# EAGLE board motor_updated_v2.0 (EAGLE 7.5.0)
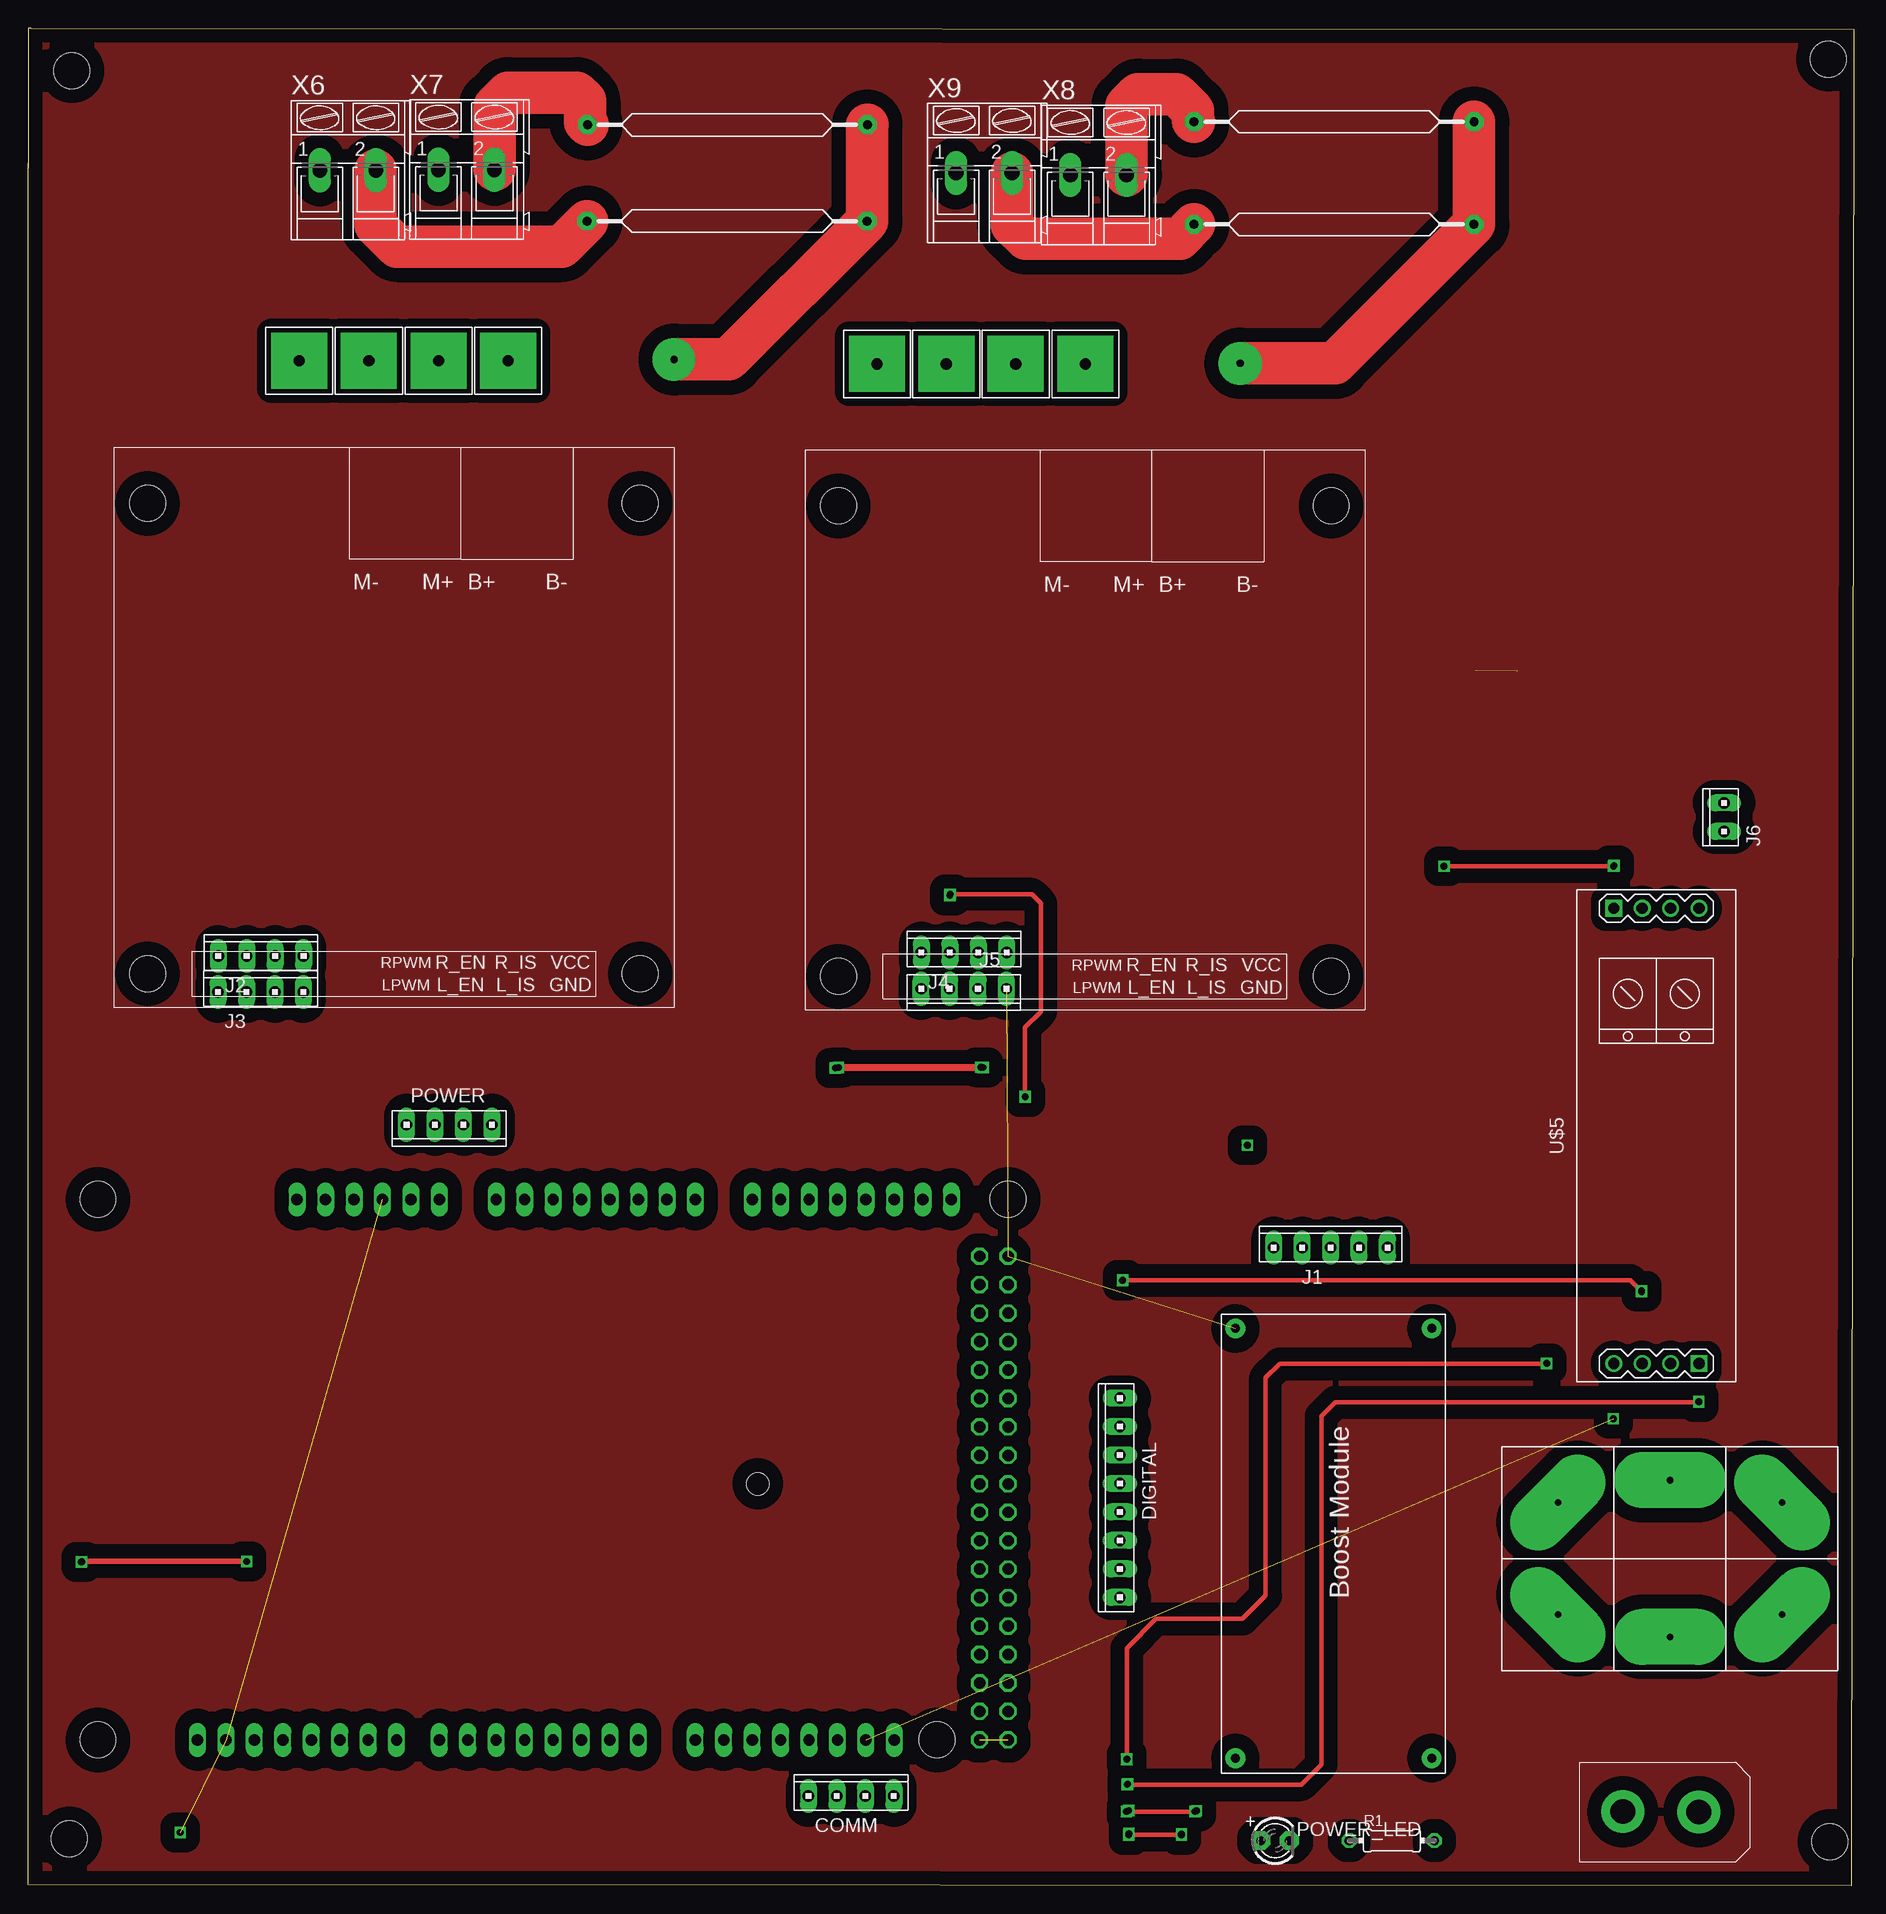
[diagram p0: board, top side]
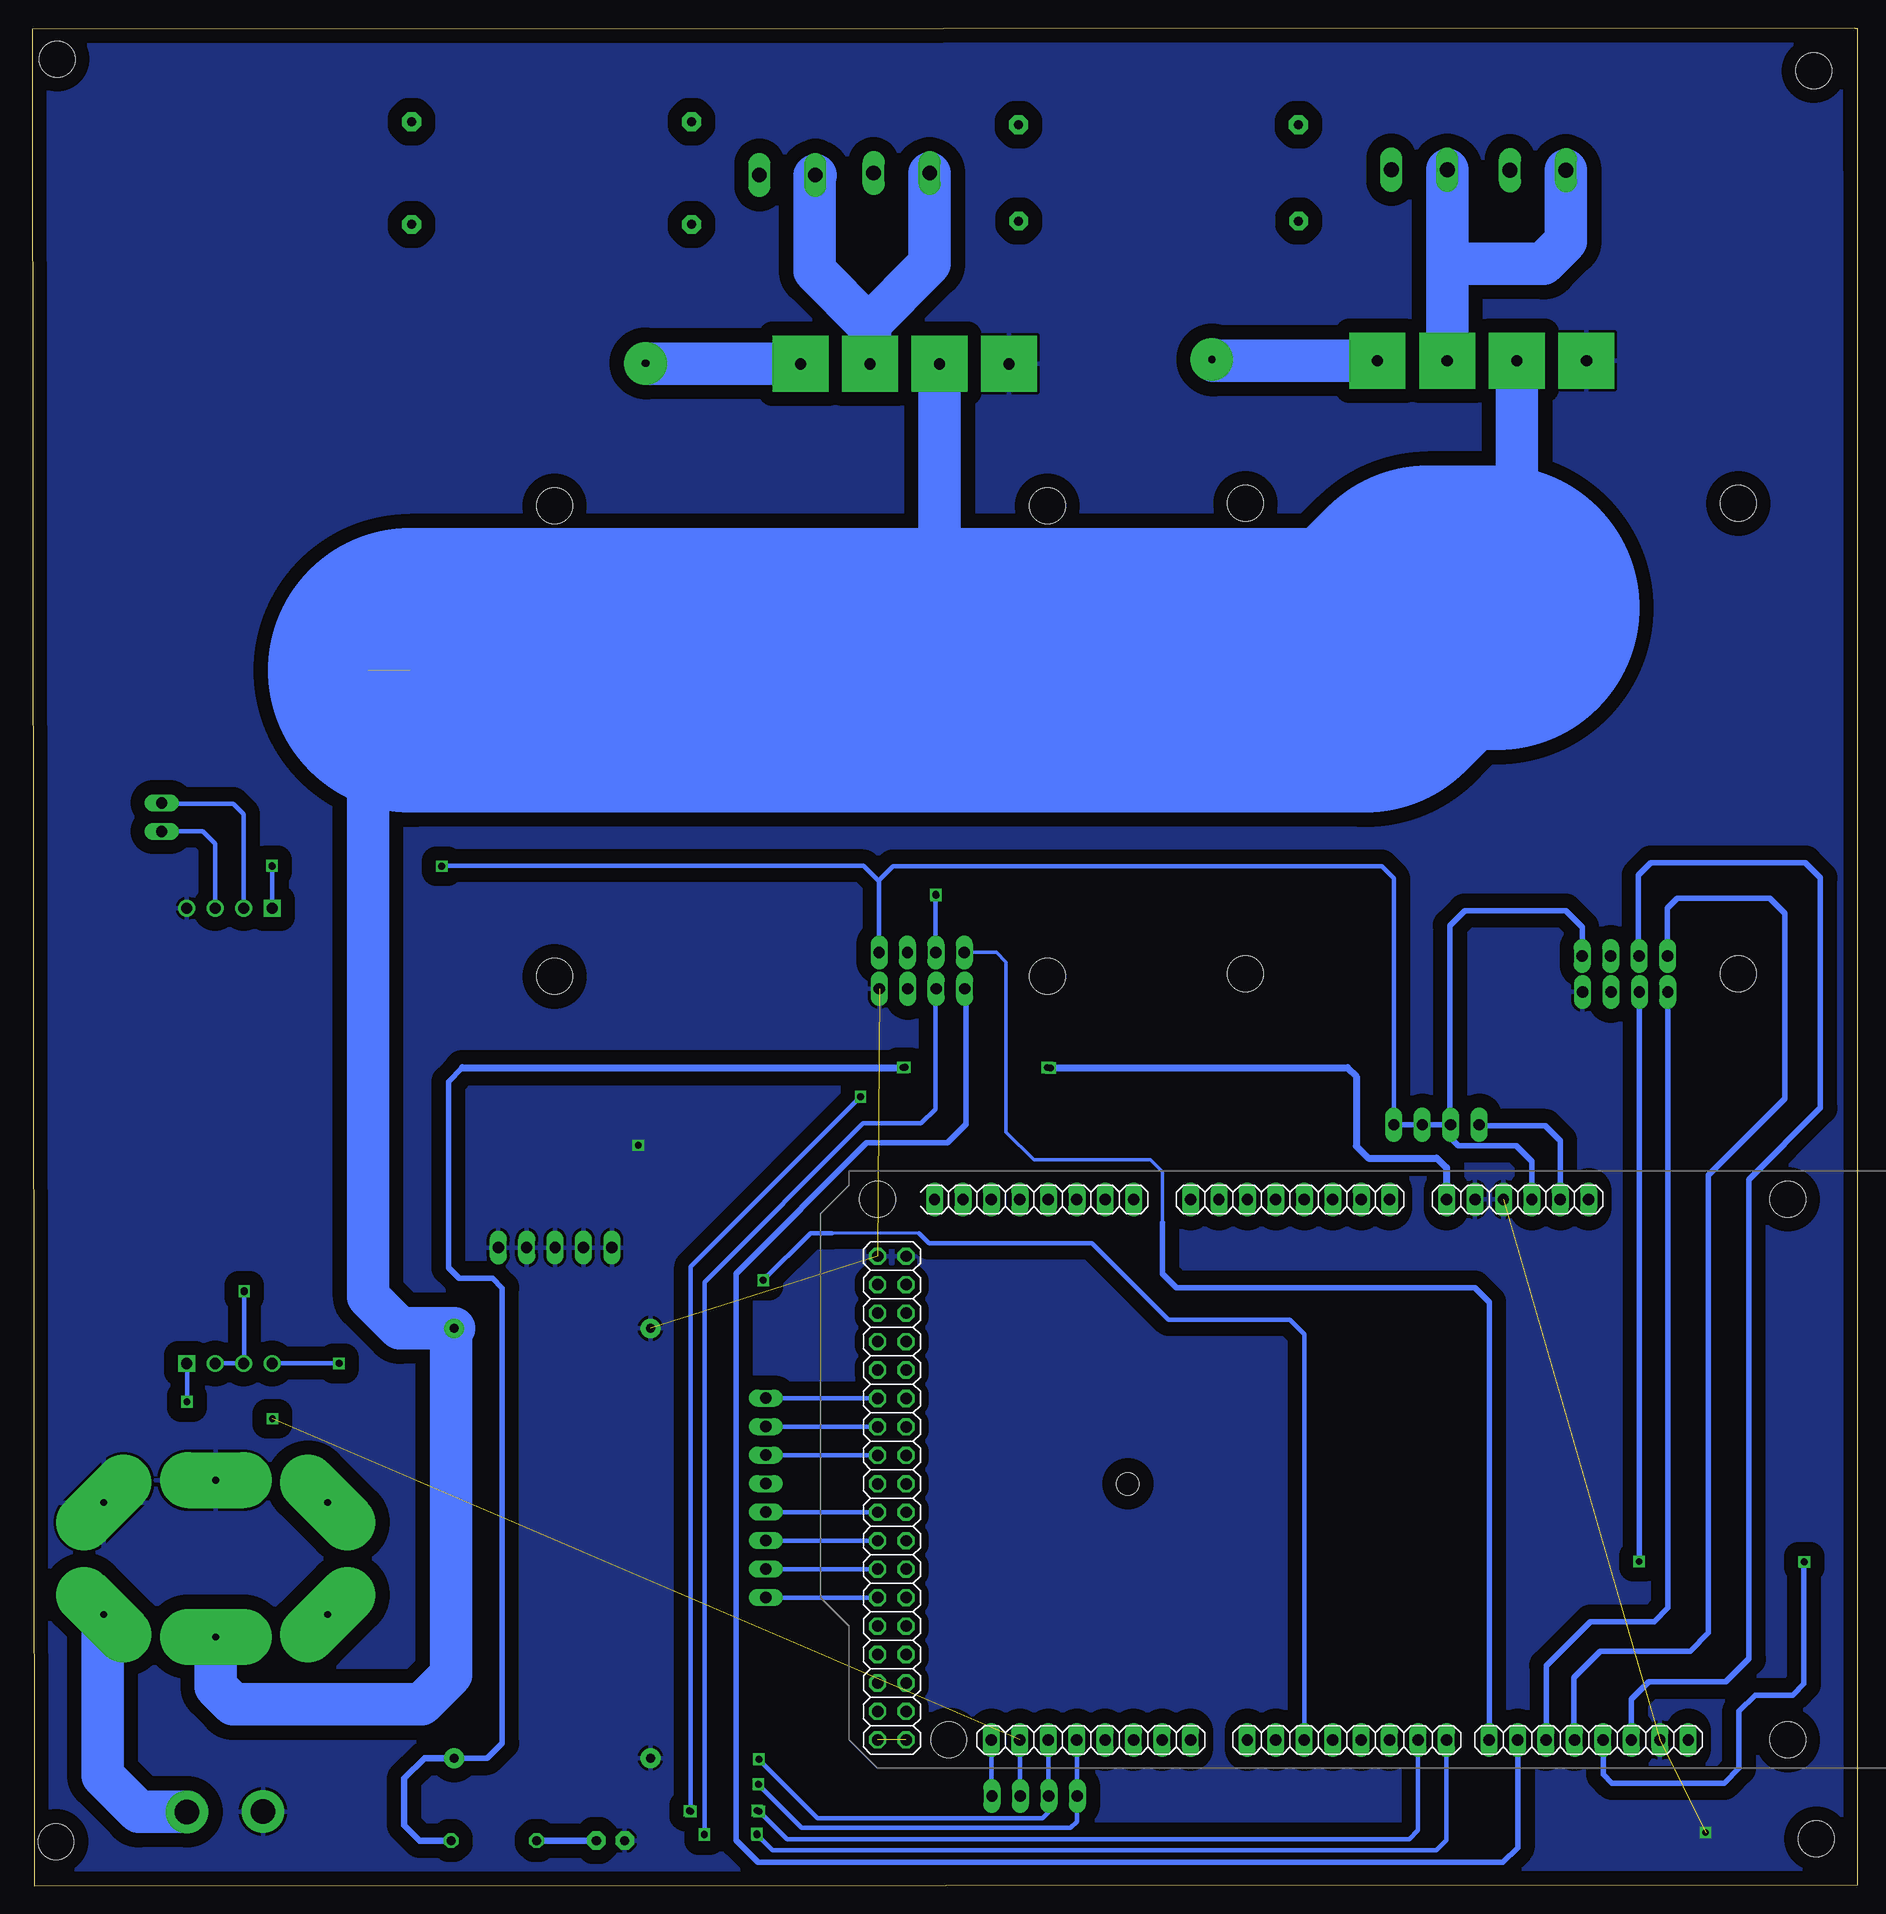
[diagram p1: board, bottom side, seen from below]

Size 163.04 x 165.86 mm. Coordinates in mm from the lower left corner, seen from the top.
Outline: 0.25,165.84 163.04,165.76 162.84,0 0,0.08 0,153.77
Outline: 0.28,165.86 0.02,165.86 0.02,153.34
Copper layers (1*16): Top 0.035mm / dielectric 1.5mm / Bottom 0.035mm
Design rules "default": minimum track width 10mil, minimum drill 24mil, track to track 8mil, track to pad 8mil, pad to pad 8mil, via to via 8mil, smd to smd 8mil, copper to edge 40mil, drill to drill 8mil, minimum pad ring 10mil, minimum via ring 8mil, stop-mask expansion 4mil, vias tented up to drill 0mil, thermal gap 10mil
Holes 3.2 mm at 3.7,4.2 160.79,163.08 3.92,162.04 160.9,3.95

## Footprints (pad centres in the part's own frame; a part is rotated, then mirrored left to right if it is on the bottom)
10X04MTA = drill 1.016 long: 1 3.81,0; 2 1.27,0; 3 -1.27,0; 4 -3.81,0
10X08MTA = drill 1.016 long: 1 8.89,0; 2 6.35,0; 3 3.81,0; 4 1.27,0; 5 -1.27,0; 6 -3.81,0; 7 -6.35,0; 8 -8.89,0
MEGA_ARDUINO = drill 1.016 long: 1 33.02,2.54; 2 35.56,2.54; 3 38.1,2.54; 4 40.64,2.54; 5 43.18,2.54; 6 45.72,2.54; 7 50.8,2.54; 8 53.34,2.54; 9 55.88,2.54; 10 58.42,2.54; 11 60.96,2.54; 12 63.5,2.54; 13 66.04,2.54; 14 68.58,2.54; 15 73.66,2.54; 16 76.2,2.54; 17 78.74,2.54; 18 81.28,2.54; 19 83.82,2.54; 20 86.36,2.54; 21 88.9,2.54; 22 91.44,2.54; 23 86.36,50.8; 24 83.82,50.8; 25 81.28,50.8; 26 78.74,50.8; 27 76.2,50.8; 28 73.66,50.8; 29 71.12,50.8; 30 68.58,50.8; 31 63.5,50.8; 32 60.96,50.8; 33 58.42,50.8; 34 55.88,50.8; 35 53.34,50.8; 36 50.8,50.8; 37 48.26,50.8; 38 45.72,50.8; 39 41.91,50.8; 40 39.37,50.8; 41 36.83,50.8; 42 34.29,50.8; 43 31.75,50.8; 44 29.21,50.8; 45 26.67,50.8; 46 24.13,50.8 | drill 1.016 octagon: 47 93.98,50.8; 48 96.52,50.8; 49 93.98,48.26; 50 96.52,48.26; 51 93.98,45.72; 52 96.52,45.72; 53 93.98,43.18; 54 96.52,43.18; 55 93.98,40.64; 56 96.52,40.64; 57 93.98,38.1; 58 96.52,38.1; 59 93.98,35.56; 60 96.52,35.56; 61 93.98,33.02; 62 96.52,33.02; 63 93.98,30.48; 64 96.52,30.48; 65 93.98,27.94; 66 96.52,27.94; 67 93.98,25.4; 68 96.52,25.4; 69 93.98,22.86; 70 96.52,22.86; 71 93.98,20.32; 72 96.52,20.32; 73 93.98,17.78; 74 96.52,17.78; 75 93.98,15.24; 76 96.52,15.24; 77 93.98,12.7; 78 96.52,12.7; 79 93.98,10.16; 80 96.52,10.16; 81 93.98,7.62; 82 96.52,7.62 | hole 3.2: 15.24,50.8; 15.24,2.54; 90.17,50.8; 96.52,2.54 | hole 2: 74.168,27.94
10X05MTA = drill 1.016 long: 1 5.08,0; 2 2.54,0; 3 0,0; 4 -2.54,0; 5 -5.08,0
10X02MTA = drill 1.016 long: 1 1.27,0; 2 -1.27,0
LED3MM = drill 0.813 pad 1.676 octagon: A -1.27,0; K 1.27,0
0204/7 = drill 0.813 octagon: 1 -3.81,0; 2 3.81,0
BOOST_MODULE = drill 0.8 pad 1.778: IN+ 1.27,18.796; IN- 1.27,1.27; OUT+ 39.624,18.796; OUT- 39.624,1.27
CONNECTOR = drill 2.2 pad 3.81: P$1 4.42,11.938; P$2 4.394,5.156
IBT-2 = hole 3.2: 34,14; -10,14; -10,-28; 34,-28
RS485-TTL-CONVERTER = drill 1 square: J1.1 -20.32,-3.81; J2.1 20.32,3.81 | drill 1: J1.2 -20.32,-1.27; J1.3 -20.32,1.27; J1.4 -20.32,3.81; J2.2 20.32,1.27; J2.3 20.32,-1.27; J2.4 20.32,-3.81
VIA = drill 1 pad 5 square: P$1 -4,3
FUSE_MINE = drill 0.8 pad 1.676 octagon: P$1 -11,4; P$2 14,4
TOGGLE = drill 0.6 pad 5 long: P$1 0,-2; P$2 0,-16; P$3 -10,-4; P$4 10,-14; P$5 -10,-14; P$6 10,-4
AK300/2 = drill 1.321 long: 1 -2.515,0; 2 2.489,0

## Placement (x,y rotation side)
COMM  [10X04MTA]  73.51,8.03 0 top
DIGITAL  [10X08MTA]  97.51,34.65 90 top
IC1  [MEGA_ARDUINO]  -8.99,63.83 180 bottom
J1  GND\  [10X05MTA]  116.33,56.97 0 top
J2  [10X04MTA]  20.8,83.01 0 top
J3  [10X04MTA]  20.78,79.81 0 top
J4  [10X04MTA]  83.59,83.31 0 top
J5  [10X04MTA]  83.57,80.09 180 top
J6  [10X02MTA]  151.46,95.4 90 top
POWER  [10X04MTA]  37.62,67.95 180 top
POWER_LED  [LED3MM]  111.38,4.04 0 top
R1  [0204/7]  121.79,4.04 0 top
U$1  BOOST_MODULE  [BOOST_MODULE]  106.55,51.03 270 top
U$2  XT60  [CONNECTOR]  137.26,11.02 270 top
U$3  [IBT-2]  20.68,109.42 0 top
U$4  [IBT-2]  82.37,109.19 0 top
U$5  RS485-TTL-CONVERTER  [RS485-TTL-CONVERTER]  145.41,66.95 90 top
U$6  VIA  [VIA]  28.22,133.15 0 top
U$8  VIA  [VIA]  86,132.87 0 top
U$9  VIA  [VIA]  79.81,132.87 0 top
U$12  VIA  [VIA]  40.67,133.15 0 top
U$13  VIA  [VIA]  46.89,133.15 0 top
U$14  VIA  [VIA]  92.2,132.87 0 top
U$15  VIA  [VIA]  98.43,132.87 0 top
U$18  FUSE_MINE  [FUSE_MINE]  60.93,144.63 0 top
U$19  FUSE_MINE  [FUSE_MINE]  63.96,161.21 180 top
U$20  FUSE_MINE  [FUSE_MINE]  115.14,153.49 0 top
U$21  FUSE_MINE  [FUSE_MINE]  118.14,152.32 180 top
U$23  VIA  [VIA]  34.44,133.15 0 top
U$24  SWITCH  [TOGGLE]  146.63,20.22 180 top
X6  [AK300/2]  28.58,153.16 0 top
X7  [AK300/2]  39.17,153.21 0 top
X8  [AK300/2]  95.61,152.73 0 top
X9  [AK300/2]  85.39,152.91 0 top

## Library data of the parts
COMM DIGITAL J1-J6 POWER = con-amp
IC1 = arduino
POWER_LED = adafruit
R1 = rcl
U$1 = Boost Module
U$2 = xt60_V2
U$3 U$4 = bts
U$5 = diy-modules
U$6 U$8 U$9 U$12-U$15 U$23 = via
U$18-U$21 = fuse_mine
U$24 = toggle
X6-X9 = con-ptr500; OC_FARNELL: unknown; OC_NEWARK: unknown

## Nets
+5V: IC1.47 IC1.48
GND: IC1.4 IC1.5 IC1.45 IC1.81 IC1.82 J1.1 J1.2 J1.3 J1.4 J1.5 J3.1 J5.4 POWER_LED.A U$1.IN- U$1.OUT- U$2.P$2 U$5.J2.4 U$6.P$1 U$9.P$1 U$24.P$2 U$24.P$5
N$1: IC1.6 R1.2 U$1.OUT+
N$2: COMM.1 IC1.23
N$3: U$2.P$1 U$24.P$3
N$4: COMM.2 IC1.24
N$5: COMM.3 IC1.25 U$5.J1.4
N$6: COMM.4 IC1.26 U$5.J1.1
N$7: IC1.2 POWER.1
N$8: DIGITAL.8 IC1.58
N$9: IC1.39 J4.4
N$11: IC1.33 U$5.J1.2 U$5.J1.3
N$12: U$1.IN+ U$8.P$1 U$23.P$1 U$24.P$1
N$14: J6.2 U$5.J2.3
N$15: POWER_LED.K R1.1
N$16: J6.1 U$5.J2.2
N$18: DIGITAL.7 IC1.60
N$19: DIGITAL.4
N$20: DIGITAL.5 IC1.64
N$21: DIGITAL.3 IC1.68
N$22: DIGITAL.2 IC1.70
N$23: DIGITAL.1 IC1.72
N$25: U$12.P$1 X6.1 X7.1
N$26: U$13.P$1 U$18.P$2 U$19.P$1
N$28: U$14.P$1 X8.1 X9.1
N$29: U$15.P$1 U$20.P$2 U$21.P$1
N$32: IC1.44 J2.3
N$34: DIGITAL.6 IC1.62
N$35: IC1.43 J3.3
N$37: IC1.37 J4.3
N$38: IC1.38 J5.2
N$39: IC1.42 J2.4
N$40: IC1.41 J3.4
N$41: U$19.P$2 X7.2
N$42: IC1.40 J5.1
N$45: U$18.P$1 X6.2
N$46: U$21.P$2 X9.2
N$47: U$20.P$1 X8.2
POWER: IC1.3 J2.1 J4.1 POWER.2 POWER.3 POWER.4 U$5.J2.1

## Tracks (layer width: path | path; a pad name or v marks a point on that pad's centre or on a via)
+5V  (1 unrouted)
GND  (via drill 0.6)  (4 unrouted)
  other vias: 108.89,66.12 13.59,4.75
  pour Bottom (isolate 1.27): -0.18,-0.23 0.18,165.74 163.3,165.66 162.94,-0.3
N$1  (via drill 0.6)
  Top 0.61: v85.29,73.05 v72.39,73.05
  Bottom 0.508: U$1.OUT+ 122.4,11.4 121.06,12.75 121.06,53.37 121.92,54.23 124.92,54.23 125.86,55.17 125.86,71.81 124.61,73.05
  Bottom 0.559: U$1.OUT+ 127.99,11.4 129.79,9.6 129.79,5.41 128.42,4.04 R1.2
  Bottom 0.61: 124.61,73.05 v85.29,73.05 | v72.39,73.05 45.57,73.05 44.78,72.26 44.78,66.04 43.71,64.97 37.59,64.97 36.73,64.11 IC1.6
N$2
  Bottom 0.406: IC1.23 77.37,8.08 COMM.1
N$3
  Bottom 3.81: U$2.P$1 153.52,6.6 156.74,9.83 156.74,24.11 U$24.P$3
N$4  (via drill 0.6)  (1 unrouted)
  Bottom 0.406: IC1.24 74.83,8.08 COMM.2
  other vias: 141.58,41.71
N$5  (via drill 0.6)
  Top 0.406: v98.12,11.28 98.12,21.21 100.74,23.83 108.46,23.83 110.52,25.88 110.52,45.34 111.79,46.61 135.56,46.61 v135.61,46.66
  Bottom 0.406: COMM.3 72.29,8.08 IC1.25 72.29,6.58 72.82,6.05 92.89,6.05 v98.12,11.28 | v135.61,46.66 141.58,46.66 U$5.J1.4
N$6  (via drill 0.6)
  Top 0.406: v98.17,9.04 113.72,9.04 115.49,10.82 115.49,41.91 116.76,43.18 149.17,43.18 v149.2,43.21
  Bottom 0.406: COMM.4 69.75,8.08 IC1.26 69.75,5.74 70.31,5.18 94.31,5.18 v98.17,9.04 | v149.2,43.21 149.2,46.61 U$5.J1.1
N$7
  Bottom 0.508: IC1.2 26.57,66.52 27.89,67.84 33.71,67.84 POWER.1
N$8
  Bottom 0.406: IC1.58 97.48,25.73 DIGITAL.8
N$9
  Bottom 0.305: 62.1,59.21 62.1,63.75 63.17,64.82 73.58,64.82 76.05,67.28 76.05,82.47 76.94,83.36 79.73,83.36 J4.4
  Bottom 0.508: IC1.39 32.92,52.12 34.21,53.42 60.86,53.42 62.08,54.64 62.08,59.18 62.1,59.21
N$10  (via drill 0.6)
  other vias: 98.32,4.67
N$11  (via drill 0.6)
  Top 0.406: v97.74,54.05 143.08,54.05 v144.09,53.04
  Bottom 0.254: 83.84,58.27 91.62,58.27
  Bottom 0.406: IC1.33 49.43,49.25 50.72,50.55 61.54,50.55 68.38,57.38 82.96,57.38 83.84,58.27 | 91.62,58.27 93.52,58.27 v97.74,54.05 | v144.09,53.04 144.09,46.69 U$5.J1.3 U$5.J1.2
N$12  (1 unrouted)
  Bottom 25.4: 32.21,114.1 38.38,114.1 43.97,108.51 129.29,108.51
  Bottom 3.81: U$8.P$1 82,114.43 | 82,114.43 82,114.14 81.86,114 | U$24.P$1 146.63,17.75 145.08,16.21 128.27,16.21 125.63,18.85 125.63,49.48 U$1.IN+ 130.2,49.76 133.02,52.58 133.02,108.46 127.48,114 81.86,114 | 81.86,114 81.66,113.79 | U$23.P$1 30.44,115.86 32.21,114.1 | 81.67,114.1 82,114.43
N$13  (via drill 0.6)
  other vias: 103,4.62
N$14
  Bottom 0.406: U$5.J2.3 146.69,93.04 147.8,94.16 151.44,94.16 J6.2
N$15
  Bottom 0.559: POWER_LED.K R1.1
N$16
  Bottom 0.406: U$5.J2.2 144.14,95.68 145.08,96.62 151.41,96.62 J6.1
N$17  (via drill 0.6)
  other vias: 98.3,6.73
N$18
  Bottom 0.406: IC1.60 97.48,28.27 DIGITAL.7
N$20
  Bottom 0.406: IC1.64 97.48,33.35 DIGITAL.5
N$21
  Bottom 0.406: IC1.68 97.48,38.43 DIGITAL.3
N$22
  Bottom 0.406: IC1.70 97.48,40.97 DIGITAL.2
N$23
  Bottom 0.406: IC1.72 97.48,43.51 DIGITAL.1
N$24  (via drill 0.6)
  other vias: 104.34,6.71
N$25
  Bottom 3.81: U$12.P$1 36.66,144.73 | 36.66,144.73 36.66,153.2 X7.1 | X6.1 26.06,146.81 28.07,144.81 36.59,144.81 36.66,144.73
N$26  (via drill 0.64 pad 3.81)
  Top 3.81: v57.68,136.27 62.58,136.27 U$18.P$2 74.94,157.19 U$19.P$1
  Bottom 3.81: U$13.P$1 57.56,136.15 v57.68,136.27
N$27  (via drill 0.6)
  other vias: 98.2,9.09
N$28
  Bottom 3.81: U$14.P$1 88.2,139.21 88.34,139.34 | 88.34,139.34 93.17,144.17 93.17,152.65 X8.1 | X9.1 82.88,144.81 88.34,139.34
N$29  (via drill 0.64 pad 3.81)
  Top 3.81: v108.23,135.92 116.73,135.92 U$21.P$1 U$20.P$2
  Bottom 3.81: U$15.P$1 108.18,135.87 v108.23,135.92
N$30
  pour Top (isolate 1.27): 0.56,165.66 163.14,166.07 162.56,0.38 -0.03,-0.03
N$31  (via drill 0.6)
  other vias: 4.75,28.91
N$32
  Bottom 0.508: IC1.44 20.22,16.66 18.67,18.21 11.79,18.21 9.73,20.27 9.73,63.04 3.33,69.44 3.33,89.99 4.67,91.34 18.47,91.34 19.58,90.22 19.58,83.06 J2.3
N$34
  Bottom 0.406: IC1.62 97.48,30.81 DIGITAL.6
N$35  (via drill 0.6)
  Top 0.508: v19.53,28.96 4.83,28.96 v4.8,28.93
  Bottom 0.508: J3.3 19.51,28.98 v19.53,28.96 | v4.8,28.93 4.8,18.03 5.82,17.02 9.17,17.02 10.62,15.57 10.62,10.49 11.94,9.17 21.95,9.17 22.73,9.96 22.73,13 IC1.43
N$37  (via drill 0.6)
  Top 0.406: v98.09,6.63 v104.22,6.63 | v89.05,70.43 89.05,76.66 90.45,78.05 90.45,87.71 89.64,88.52 v82.35,88.52
  Bottom 0.406: IC1.37 39.27,4.95 40.06,4.17 95.63,4.17 v98.09,6.63 | v104.22,6.63 104.22,55.27 v89.05,70.43 | v82.35,88.52 82.35,83.34 J4.3
N$38  (via drill 0.6)
  Top 0.406: v98.3,4.55 v103,4.55
  Bottom 0.406: IC1.38 36.73,4.09 37.64,3.17 96.93,3.17 v98.3,4.55 | v103,4.55 103,53.9 88.82,68.07 83.64,68.07 82.37,69.34 82.37,80.01 J5.2
N$39
  Bottom 0.508: J2.4 16.99,87.27 16.1,88.16 7.85,88.16 6.53,86.84 6.53,70.26 13.33,63.45 13.33,22.58 14.96,20.95 22.99,20.95 25.38,18.57 25.38,13.11 IC1.42
N$40
  Bottom 0.508: J3.4 16.97,24.82 18.19,23.6 23.88,23.6 27.81,19.66 27.81,13.06 IC1.41
N$41
  Top 3.81: X7.2 41.66,158.88 42.88,160.1 49,160.1 49.73,159.36 49.73,157.44 U$19.P$2
N$42
  Bottom 0.508: IC1.40 30.38,3.4 31.7,2.08 98.2,2.08 100.18,4.06 100.18,54.66 88.52,66.32 81.31,66.32 79.65,67.97 79.65,79.98 J5.1
N$43  (via drill 0.6)
  other vias: 97.76,54.08
N$44  (via drill 0.6)
  other vias: 144.09,53.14
N$45
  Top 3.81: X6.2 31.06,148.23 32.94,146.35 47.66,146.35 U$18.P$1
N$46
  Top 3.81: X9.2 87.88,148.26 89.1,147.04 102.85,147.04 U$21.P$2
N$47
  Top 3.81: X8.2 98.09,158.93 99.14,159.97 102.56,159.97 104.04,158.5 104.04,157.59 U$20.P$1
N$48  (via drill 0.6)
  other vias: 98.15,11.33
N$49  (via drill 0.6)
  other vias: 89.05,70.46
N$50  (via drill 0.6)
  other vias: 82.32,88.42
N$51  (via drill 0.6)
  other vias: 85.09,73.08
N$52  (via drill 0.6)
  other vias: 72.09,73.03
N$53  (via drill 0.64 pad 3.81)
  other vias: 108.28,135.92
N$54  (via drill 0.6)
  other vias: 135.64,46.63
N$55  (via drill 0.6)
  other vias: 149.2,43.23
N$56  (via drill 0.6)
  other vias: 126.47,91.03
N$57  (via drill 0.6)
  other vias: 141.63,91.08
POWER  (via drill 0.6)
  Top 0.406: v126.44,91.03 v141.6,91.03
  Bottom 0.406: POWER.4 41.43,89.94 42.52,91.03 86.16,91.03 87.43,89.76 | 87.43,89.76 87.43,83.34 J4.1 | 87.43,89.76 87.48,89.76 88.77,91.06 126.42,91.06 v126.44,91.03 | v141.6,91.03 U$5.J2.1
  Bottom 0.508: POWER.2 POWER.3 POWER.4 | J2.1 24.61,85.6 26.09,87.07 35.1,87.07 36.45,85.72 36.45,68.05 POWER.2 | IC1.3 29.11,64.69 30.51,66.09 35.66,66.09 36.37,66.8 36.37,67.92 POWER.2